# EAGLE board EGB240_Assessment1_PCB_n10789511.brd (EAGLE 9.6.2)
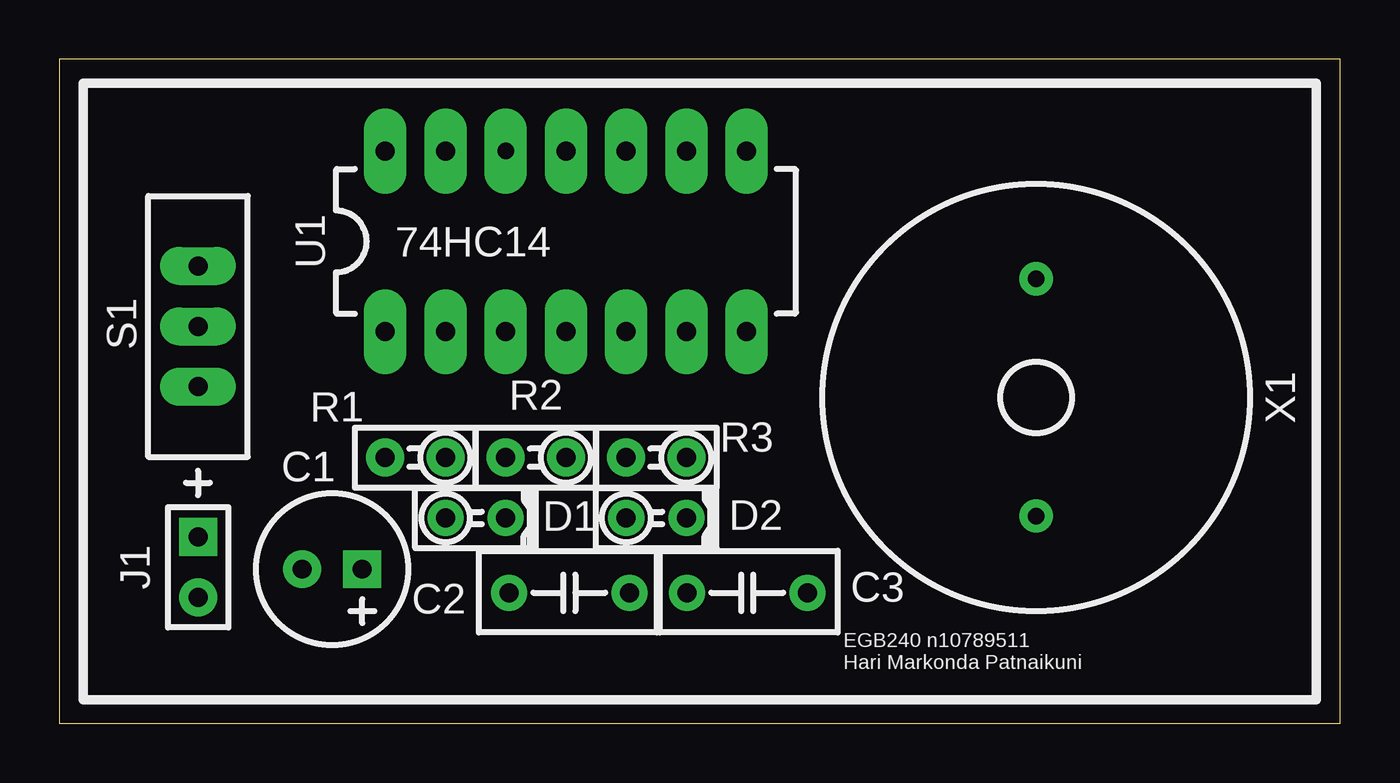
[diagram p0: board, top side]
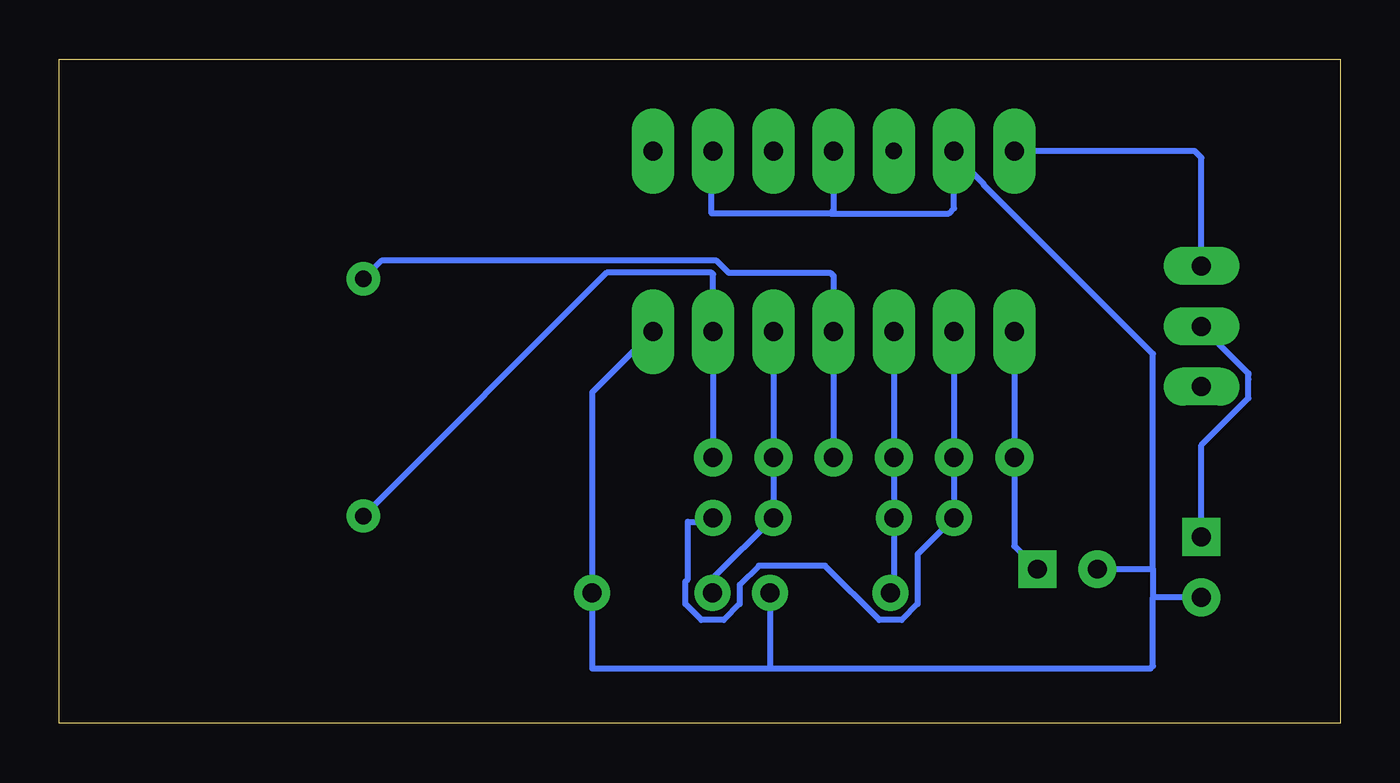
[diagram p1: board, bottom side, seen from below]

Size 54 x 28 mm. Coordinates in mm from the lower left corner, seen from the top.
Outline: 0,0 54,0 54,28 0,28 0,0
Copper layers (1*16): Top 0.035mm / dielectric 1.5mm / Bottom 0.035mm
Design rules "default *": minimum track width 10mil, minimum drill 20mil, track to track 10mil, track to pad 10mil, pad to pad 10mil, via to via 10mil, smd to smd 8mil, copper to edge 1mm, drill to drill 20mil, minimum pad ring 10mil, minimum via ring 8mil, stop-mask expansion 4mil, vias tented up to drill 0mil, thermal gap 10mil
bKeepout: 4 lines

## Footprints (pad centres in the part's own frame; a part is rotated, then mirrored left to right if it is on the bottom)
CAP-RB-P2.54-D6.3 = drill 0.8 pad 1.6 square: P$1 -1.27,0 | drill 0.8 pad 1.6: P$2 1.27,0
CAP-GREEN-7.5X3.2-P5.08 = drill 0.8 pad 1.524: P$1 -2.54,0; P$2 2.54,0
DO35-P2.54 = drill 0.8 pad 1.524: A 1.27,0; K -1.27,0
BATT-3V = drill 0.8 pad 1.6 square: P$1 -1.27,0 | drill 0.8 pad 1.6: P$2 1.27,0
AXIAL-P2.54 = drill 0.8 pad 1.6: P$1 -1.27,0; P$2 1.27,0
SS-12 = drill 0.8 pad 1.6 long: 1 0,2.54; 2 0,0; 3 0,-2.54
DIP-14 = drill 0.8 pad 1.8 long: P$1 -3.81,7.62; P$2 -3.81,5.08; P$3 -3.81,2.54; P$4 -3.81,0; P$5 -3.81,-2.54; P$6 -3.81,-5.08; P$7 -3.81,-7.62; P$8 3.81,-7.62; P$9 3.81,-5.08; P$10 3.81,-2.54; P$11 3.81,0; P$13 3.81,5.08; P$14 3.81,7.62 | drill 0.7 pad 1.8 long: P$12 3.81,2.54
PS1720P02 = drill 0.7 pad 1.4: P$1 -5,0; P$2 5,0

## Placement (x,y rotation side)
C1  100uF  [CAP-RB-P2.54-D6.3]  11.5,6.5 180 top
C2  18nF  [CAP-GREEN-7.5X3.2-P5.08]  21.5,5.5 0 top
C3  39nF  [CAP-GREEN-7.5X3.2-P5.08]  29,5.5 0 top
D1  1N4148  [DO35-P2.54]  17.55,8.66 180 top
D2  1N4148  [DO35-P2.54]  25.17,8.66 180 top
J1  2xAA  [BATT-3V]  5.85,6.58 270 top
R1  27k  [AXIAL-P2.54]  15.01,11.2 0 top
R2  10k  [AXIAL-P2.54]  20.09,11.2 0 top
R3  10k  [AXIAL-P2.54]  25.17,11.2 0 top
S1  [SS-12]  5.85,16.74 0 top
U1  74HC14  [DIP-14]  21.36,20.32 90 top
X1  PS1720P02  [PS1720P02]  41.18,13.74 270 top

## Library data of the parts
C1-C3 D1 D2 J1 R1-R3 S1 U1 X1 = EGB240

## Nets
+3V: S1.1 U1.P$14
GND: C1.P$2 C2.P$2 C3.P$2 J1.P$2 U1.P$7 U1.P$9 U1.P$11 U1.P$13
N$1: C1.P$1 R1.P$1 U1.P$1
N$2: J1.P$1 S1.2
N$4: C2.P$1 D1.K R2.P$1 U1.P$3
N$6: C3.P$1 D2.A R3.P$1 U1.P$5
SW: D1.A D2.K R1.P$2 U1.P$2
TONE1: R2.P$2 U1.P$4 X1.P$1
TONE2: R3.P$2 U1.P$6 X1.P$2

## Tracks (layer width: path | path; a pad name or v marks a point on that pad's centre or on a via)
+3V
  Bottom 0.254: S1.1 5.85,23.85 6.13,24.13 U1.P$14
GND
  Bottom 0.254: 24,2.31 31.52,2.31 31.54,2.33 C3.P$2 31.54,13.95 U1.P$7 | 24,2.31 8,2.31 7.9,2.41 7.9,5.31 | 7.9,6.5 7.9,5.31 | J1.P$2 7.9,5.31 | C2.P$2 24.04,2.35 24,2.31 | C1.P$2 7.9,6.5 | U1.P$9 26.5,24.07 26.5,21.5 21.5,21.5 | U1.P$11 21.36,21.64 21.5,21.5 | 21.5,21.5 16.5,21.5 16.28,21.72 16.28,24 | 16.28,24 U1.P$13 | 16.28,24 15.02,22.74 15.02,22.7 7.9,15.58 7.9,6.5
N$1
  Bottom 0.254: U1.P$1 R1.P$1 13.74,7.47 C1.P$1
N$2
  Bottom 0.254: J1.P$1 5.85,11.73 3.87,13.71 3.87,14.5 3.87,14.69 3.87,14.76 S1.2
N$4
  Bottom 0.254: C2.P$1 18.82,5.64 D1.K R2.P$1 U1.P$3
N$6
  Bottom 0.254: U1.P$5 R3.P$1 D2.A 26.46,6.1 C3.P$1
SW
  Bottom 0.254: U1.P$2 R1.P$2 D1.A 17.82,7.12 17.82,5.03 18.49,4.36 19.43,4.36 21.72,6.64 24.51,6.64 25.32,5.84 25.32,5.03 25.99,4.36 26.93,4.36 27.6,5.03 27.6,5.97 27.5,6.08 27.5,8.5 26.6,8.5 D2.K
TONE1
  Bottom 0.254: R2.P$2 U1.P$4 21.36,18.86 21.5,19 25.78,19 26.29,19.51 40.41,19.51 X1.P$1
TONE2
  Bottom 0.254: R3.P$2 U1.P$6 26.44,18.94 26.5,19 30.92,19 X1.P$2

## Text on the board
tPlace: EGB240 n10789511 / Hari Markonda Patnaikuni